# Altium PCB Cabinet_System_Bmduino.PcbDoc
Units mil, origin at the board's own origin, x right, y up, seen from the top; angles counter-clockwise.
Board outline 2057.9 x 2157.9 mil, 2 copper layers (Top Layer, Bottom Layer); 36 components, 34 nets, 170 pads, 44 vias.
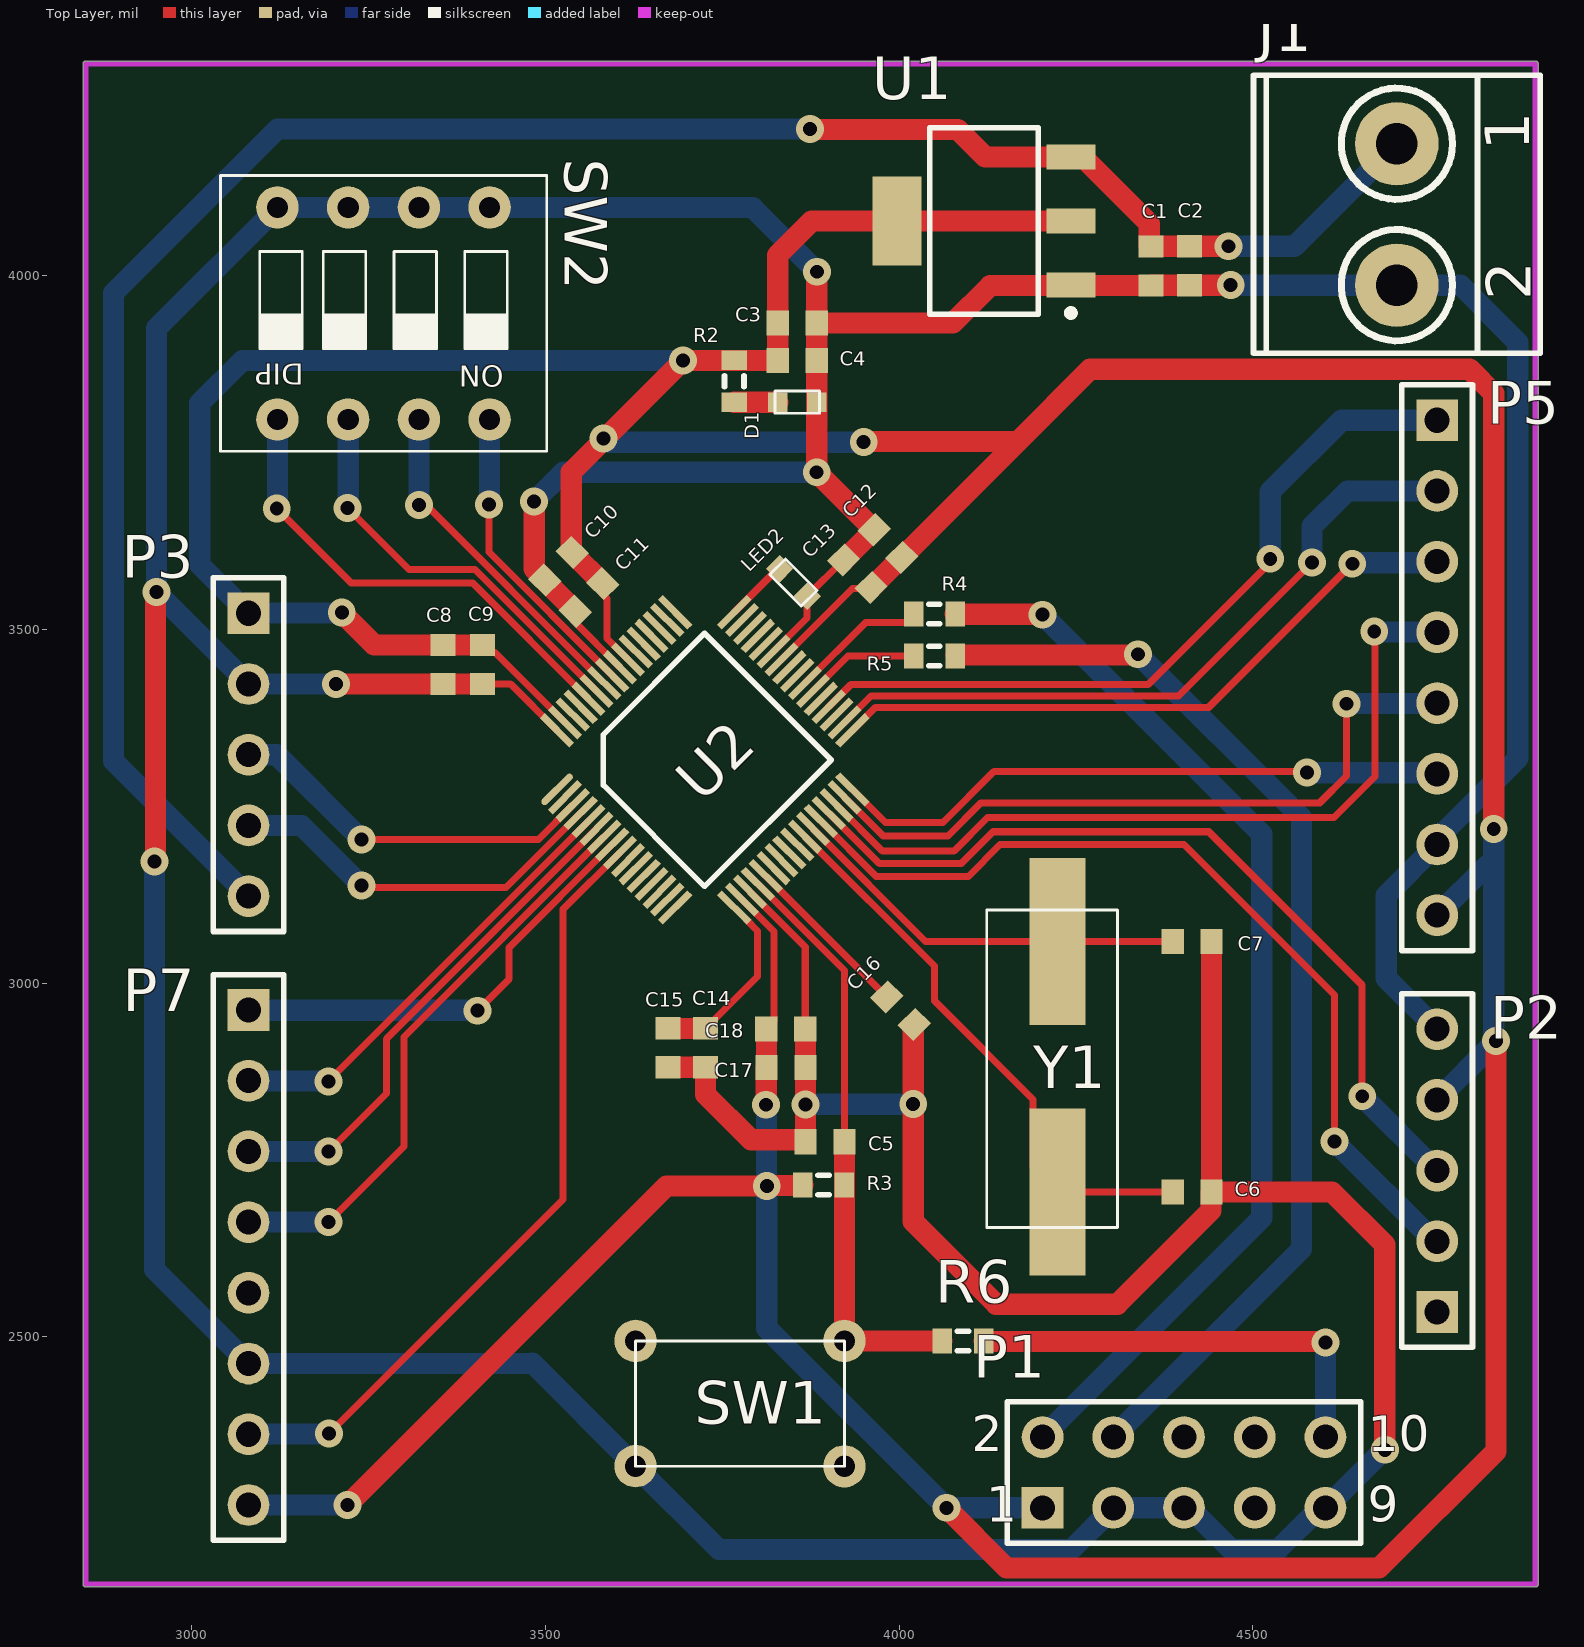
[diagram p0: Top Layer view]
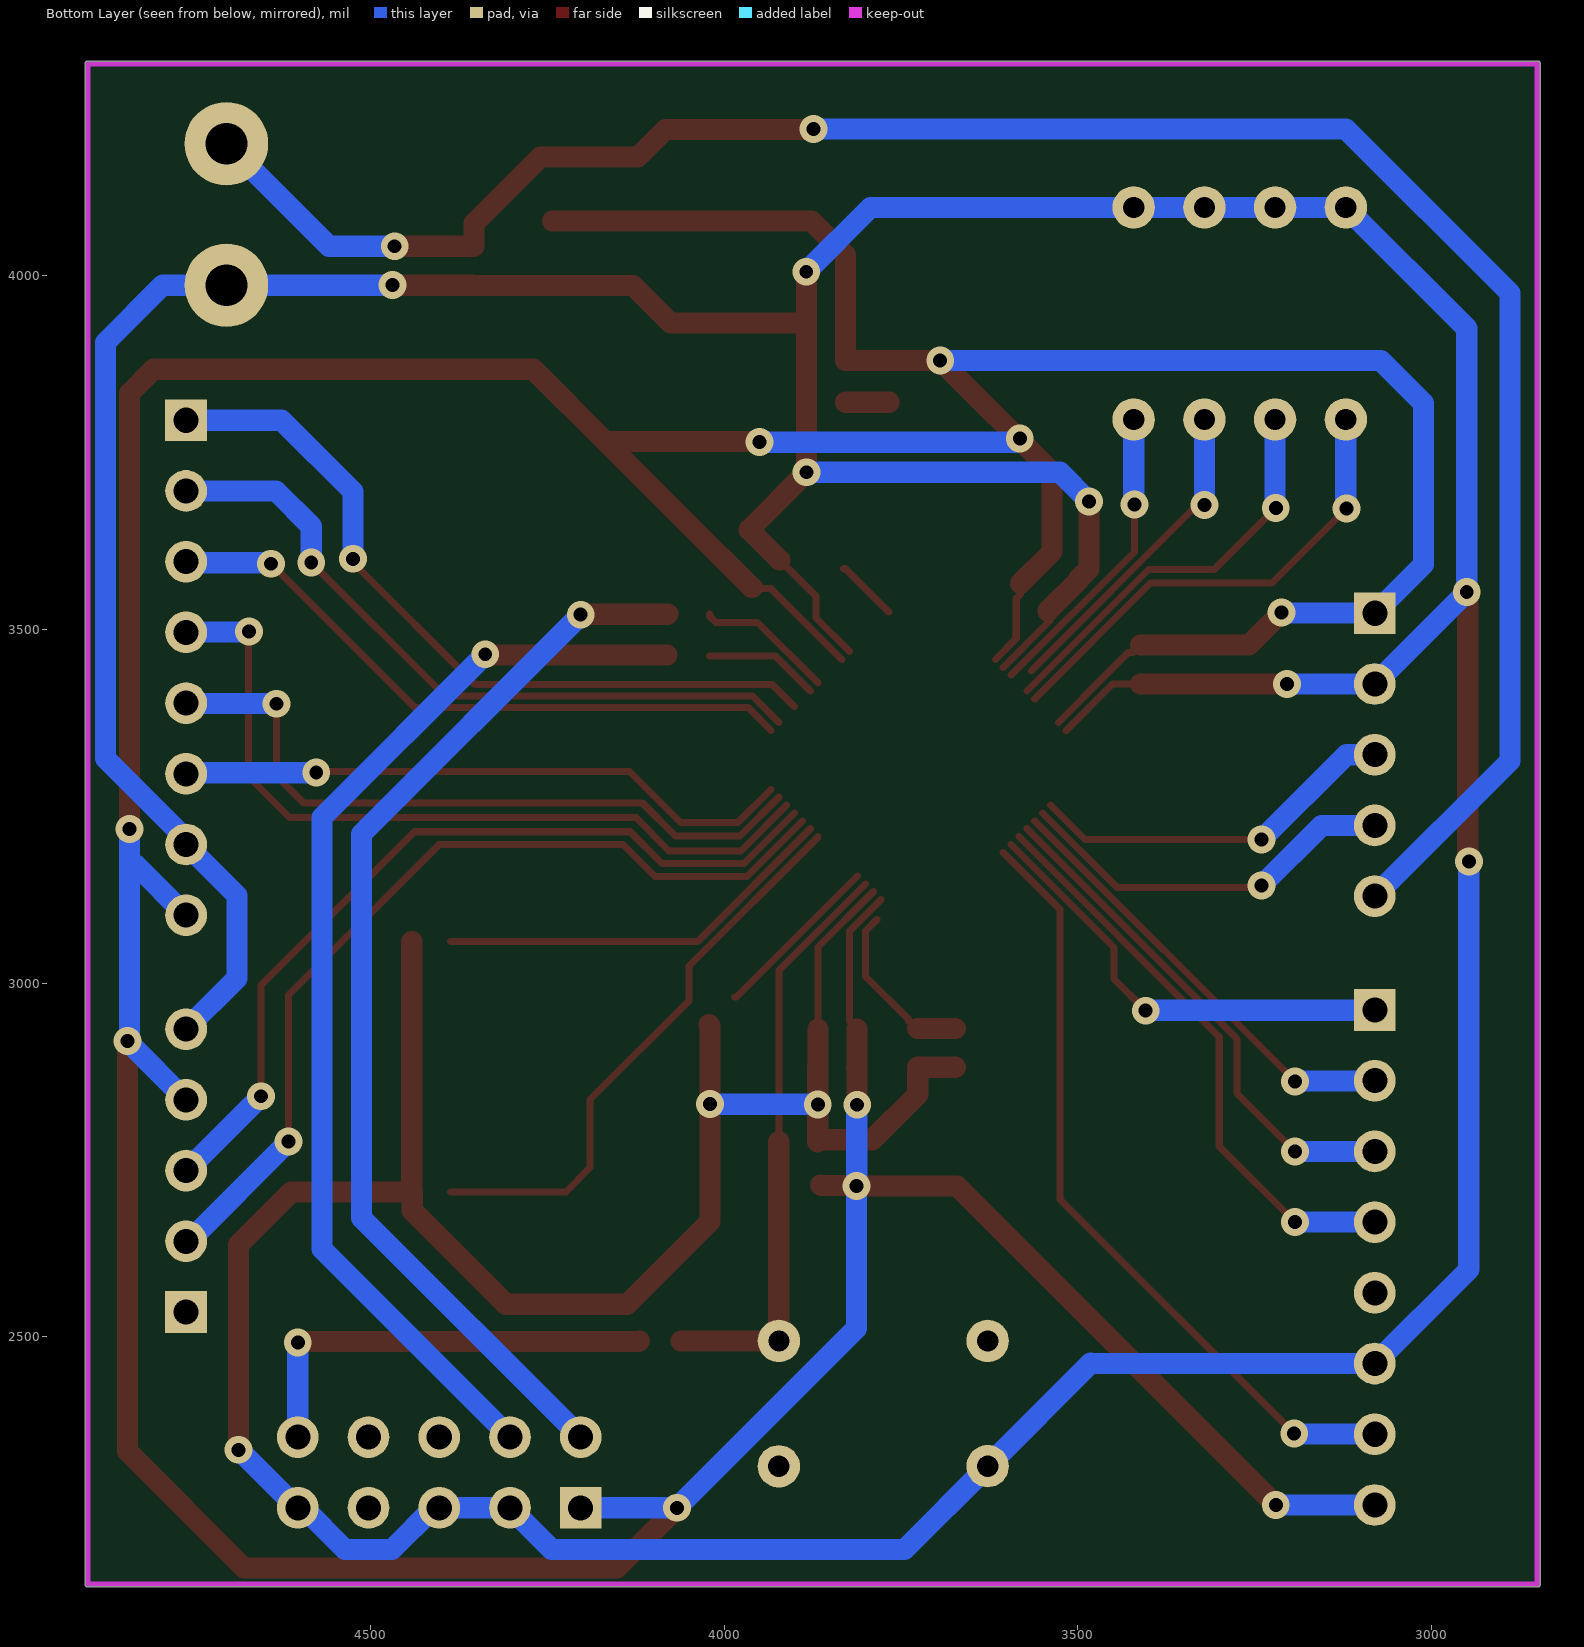
[diagram p1: Bottom Layer view, seen from below]

## Layer stack, top to bottom
Top Solder: solder mask 0.4, Solder Resist, Dk 3.5
Top Layer: signal copper 1.4
Dielectric 1: dielectric 12.6, FR-4, Dk 4.8
Bottom Layer: signal copper 1.4
Bottom Solder: solder mask 0.4, Solder Resist, Dk 3.5

## Board outline
2846.05,2150 ccw(c2850,2150) 2850,2146.05 4900,2146.05 ccw(c4900,2150) 4903.95,2150 4903.95,4300 ccw(c4900,4300) 4900,4303.95 2850,4303.95 ccw(c2850,4300) 2846.05,4300

## Design rules (kind name [scope] priority, off if disabled: settings)
Clearance [All] p1: gap=4 ignorepadtopadclearanceinfootprint=FALSE
PolygonConnect [All] p1: connectstyle=Relief reliefconductorwidth=10 reliefentries=4 polygonreliefangle="90 Angle" airgapwidth=10
RoutingVias [All] p1: holewidth=19.68 width=39.37 viastyle="Through Hole" minholewidth=19.68 minwidth=39.37 maxholewidth=19.68 maxwidth=39.37
SolderMaskExpansion [All] p1: expansion=4 istentingtop=FALSE
Width [All] p1: maxlimit=60 minlimit=7 preferedwidth=30 toplayer_maxwidth=30 minimp=50.000000 maximp=50.000000 favimp=50.000000
30 further rules are at their usual default settings.

## Components (designator, comment, footprint, x,y, rotation, side; value= is the part's Value field where it differs from the comment)
C1 "Cap Semi" 1608[0603] 4356.54,4014.12 r90 top value=0.1uF
C2 "Cap Semi" 1608[0603] 4411,4014.56 r90 top value=2.2uF
C3 "Cap Semi" 1608[0603] 3856,3933.6 r180 top value=0.1uF
C4 "Cap Semi" 1608[0603] 3856,3880.6 r180 top value=2.2uF
C5 "Cap Semi" 1608[0603] 3895.25,2775.67 r180 top value=0.01uF
C6 "Cap Semi" 1608[0603] 4414.44,2704.67 r0 top value=12pF
C7 "Cap Semi" 1608[0603] 4414.44,3059 r180 top value=12pF
C8 "Cap Semi" 1608[0603] 3355,3450.56 r270 top value=2.2uF
C9 "Cap Semi" 1608[0603] 3411,3450.56 r90 top value=0.1uF
C10 "Cap Semi" 1608[0603] 3518.49,3589.49 r225 top value=2.2uF
C11 "Cap Semi" 1608[0603] 3561.49,3545.49 r45 top value=0.1uF
C12 "Cap Semi" 1608[0603] 3984.51,3621.49 r135 top value=2.2uF
C13 "Cap Semi" 1608[0603] 3941,3579 r315 top value=0.1uF
C14 "Cap Semi" 1608[0603] 3726.44,2908.44 r270 top value=2.2uF
C15 "Cap Semi" 1608[0603] 3673.44,2908.44 r90 top value=0.1uF
C16 "Cap Semi" 1608[0603] 4002.03,2961 r135 top value=0.1uF
C17 "Cap Semi" 1608[0603] 3840.14,2880.88 r0 top value=2.2uF
C18 "Cap Semi" 1608[0603] 3839.85,2934.88 r180 top value=0.1uF
D1 "green_light" LED_Green 3828.44,3821.54 r0 top
J1 "Terminal_Block" "terminal block" 4704,3987 r0 top
LED2 "green_light" LED_Green 3831.03,3585.97 r315 top
P1 "SW-DP" HDR2X5 4203,2258 r0 top
P2 "Wi-Fi_USART1" HDR1X5 4761,2534.88 r90 top
P3 "Barcode & RS232" HDR1X5 3080,3523 r270 top
P5 "Epaper" HDR1X8 4761,3796 r270 top
P7 "RFID-RC522" HDR1X8 3080,2962 r270 top
R2 "Res3" J1-0603 3767,3851.07 r270 top value=100
R3 "Res3" J1-0603 3893.29,2714.67 r0 top value=100
R4 "Res3" J1-0603 4050,3522.14 r180 top value=100
R5 "Res3" J1-0603 4050,3462.68 r180 top value=100
R6 "Res3" J1-0603 4090.47,2494 r180 top value=100
SW1 "BUTTON_DIP_4PIN" Push_Button 3627.44,2316.83 r0 top
SW2 "DIP_4_Switch" Switch_4 3421,4097 r180 top
U1 "LM1117" "LM1117 - duplicate" 4120,4077.55 r180 top
U2 "HT32F52367" HT32H52367 3516.37,3273.95 r45 top
Y1 "SMD_8MHz" Quartz-Crystal-8MHz 4224,2714.51 r90 top

## Footprints (in the part's own frame and the unit in brackets; to place one, negate y for a bottom-side part, rotate by r counter-clockwise, add the part's x,y. Pads: shape width x height; smd on the part's side, far side on the other; paste and mask are expansions set on the pad)
1608[0603] [mm] "Chip Capacitor, Body 1.6x0.8mm, IPC High Density"
  rect 0.8x0.9 smd: 1(-0.7,0) 2(0.7,0)
  body extent -0.87,-0.48 0.87,0.48, height 1.3
HDR1X5 [mm] "Connector; Header; 5 Position"
  rect 1.5x1.5 hole 0.9: 1(0,0)
  round 1.5 hole 0.9: 2(2.54,0) 3(5.08,0) 4(7.62,0) 5(10.16,0)
  silkscreen extent -1.27,-1.27 11.43,1.27
HDR1X8 [mm] "Connector; Header; 8 Position"
  rect 1.5x1.5 hole 0.9: 1(0,0)
  round 1.5 hole 0.9: 2(2.54,0) 3(5.08,0) 4(7.62,0) 5(10.16,0) 6(12.7,0) 7(15.24,0) 8(17.78,0)
  silkscreen extent -1.27,-1.27 19.05,1.27
HDR2X5 [mm] "Connector; Header; 5x2 Position"
  rect 1.5x1.5 hole 0.9: 1(0,0)
  round 1.5 hole 0.9: 2(0,2.54) 3(2.54,0) 4(2.54,2.54) 5(5.08,0) 6(5.08,2.54) 7(7.62,0) 8(7.62,2.54) 9(10.16,0) 10(10.16,2.54)
  silkscreen extent -1.27,-1.27 11.43,3.81
HT32H52367 [mm] "HT32H52367"
  oval 1.5x0.25 smd: 1(0,0)
  rect 1.5x0.25 smd: 2(0,-0.4) 3(0,-0.8) 4(0,-1.2) 5(0,-1.6) 6(0,-2) 7(0,-2.4) 8(0,-2.8) 9(0,-3.2) 10(0,-3.6) 11(0,-4) 12(0,-4.4) 13(0,-4.8) 14(0,-5.2) 15(0,-5.6) 16(0,-6) 33(9,-6) 34(9,-5.6) 35(9,-5.2) 36(9,-4.8) 37(9,-4.4) 38(9,-4) 39(9,-3.6) 40(9,-3.2) 41(9,-2.8) 42(9,-2.4) 43(9,-2) 44(9,-1.6) 45(9,-1.2) 46(9,-0.8) 47(9,-0.4) 48(9,0)
  rect 0.25x1.5 smd: 17(1.5,-7.5) 18(1.9,-7.5) 19(2.3,-7.5) 20(2.7,-7.5) 21(3.1,-7.5) 22(3.5,-7.5) 23(3.9,-7.5) 24(4.3,-7.5) 25(4.7,-7.5) 26(5.1,-7.5) 27(5.5,-7.5) 28(5.9,-7.5) 29(6.3,-7.5) 30(6.7,-7.5) 31(7.1,-7.5) 32(7.5,-7.5) 49(7.5,1.5) 50(7.1,1.5) 51(6.7,1.5) 52(6.3,1.5) 53(5.9,1.5) 54(5.5,1.5) 55(5.1,1.5) 56(4.7,1.5) 57(4.3,1.5) 58(3.9,1.5) 59(3.5,1.5) 60(3.1,1.5) 61(2.7,1.5) 62(2.3,1.5) 63(1.9,1.5) 64(1.5,1.5)
  silkscreen extent 1.28,-6.21 7.71,0.22
J1-0603 [mm] "Chip Resistor, Body 1.6x0.8mm, IPC High Density"
  rect 0.7x0.9 smd: 1(-0.75,0) 2(0.75,0)
  silkscreen extent -0.2,-0.35 0.2,0.35, body extent -0.85,-0.48 0.85,0.48, height 0.9
LED_Green [mm] "LED_0603"
  rect 0.7x0.7 smd: 1(0,0) 2(1.4,0)
  silkscreen extent -0.1,-0.4 1.5,0.4
"LM1117 - duplicate" [mm] "SOT223, 4-Leads, Body 6.50x7.00mm (avg), Pitch 2.30mm, IPC Medium Density"
  rect 1.75x0.9 smd: 1(-3.125,2.3) 2(-3.125,0) 3(-3.125,-2.3)
  rect 1.75x3.2 smd: 4(3.125,0)
  silkscreen extent -3.25,-3.35 1.95,3.42, body extent -1.85,-3.35 1.85,3.35, height 1.8
Push_Button [mil] "6*6"
  round 60 hole 30: 1(0,177.17) 2(0,0) 3(295.28,177.17) 4(295.37,-0.17)
  silkscreen extent 0,0 295,177
Quartz-Crystal-8MHz [mm] "Quartz-Crystal-8MHz"
  rect 6x2 smd: 1(-0.25,0) 2(8.75,0)
  silkscreen extent -1.52,-2.16 9.88,2.54
Switch_4 [mil] "DIP_4_Switch"
  round 60 hole 30: 1(0,300) 2(100,300) 3(200,300) 4(300,300) 5(0,0) 6(100,0) 7(200,0) 8(300,0)
  silkscreen extent -81,-45 381,345
"terminal block" [mm]
  round 3 hole 1.5 paste+0 mask+0.051: 1(0,5.08) 2(0,0)
  silkscreen extent -5.15,-2.44 5.15,7.54

## Part data
C1 C2 C3 C4 C5 C6 C7 C8 C9 C10 C11 C12 C13 C14 C15 C16 C17 C18: "Capacitor (Semiconductor SIM Model)", LatestRevisionDate=29-May-2009, LatestRevisionNote="IPC-7351 Footprint Added.", PackageDescription="Chip Capacitor", PackageReference=C1206, Published=8-Jun-2000, Publisher="Altium Limited"
D1 LED2: library part LED_Green
J1: library part "Terminal Block"
P1: library part "Header 5X2", "Header, 5-Pin, Dual row", LatestRevisionDate=17-Jul-2002, LatestRevisionNote="Re-released for DXP Platform.", Publisher="Altium Limited"
P2 P3: library part "Header 5", "Header, 5-Pin", LatestRevisionDate=17-Jul-2002, LatestRevisionNote="Re-released for DXP Platform.", Publisher="Altium Limited"
P5 P7: library part "Header 8", "Header, 8-Pin", LatestRevisionDate=17-Jul-2002, LatestRevisionNote="Re-released for DXP Platform.", Publisher="Altium Limited"
R2 R3 R4 R5 R6: "Resistor", LatestRevisionDate=29-May-2009, LatestRevisionNote="IPC-7351 Footprint Added.", PackageDescription="Chip Resistor", PackageReference=J1-0603, Published=8-Jun-2000, Publisher="Altium Limited"
SW1: library part Push_Button
SW2: library part Switch_4
Y1: library part Quartz_Crystal_8MHz

## Via types
v1: diameter 39.37, hole 19.68, Top Layer to Bottom Layer, 44 vias

## Nets (pads, with @x,y where several pads share a name; then routed paths per layer and width w, separated by ;. In a path a pad name is that pad's centre, name@x,y a point inside that pad or via, vN(x,y) a via of type N, cw(c..) or ccw(c..) an arc to the next point about the centre after c; other vN are vias at no path point)
3.3V: C3.2 C4.2 C8.1 C9.2 C10.1 C11.2 C12.1 C13.2 C17.1 C18.2 P1.1 P2.4 P3.1 P5.8 P7.8 R2.1 R3.1 U1.2 U1.4 U2.18 U2.42 U2.55 U2.63 | length 9247.5
  Top Layer w10: C9.2 3421.75,3467.37 3428.73,3467.37 3459.1,3437 U2.63 ; C11.2 3580.97,3549.77 3587,3543.75 3587,3487.27 U2.55 ; U2.18 3823.15,3072.95 3823.03,3072.83 3823.03,2945.63 C18.2 ; U2.42 3934.16,3558.12 3959.1,3558.12 C13.2
  Top Layer w30: v1(3212,3524) 3257.88,3478.12 C8.1 C9.2 ; v1(3220,2262) 3671,2713 v1(3813,2713) 3813.83,2713.83 3862.92,2713.83 R3.1 ; C11.2 3580.97,3565.47 3537.97,3608.47 C10.1 3536.58,3610.37 3536.58,3722.58 v1(3694.6,3880.6) R2.1 C4.2 C3.2 3828.44,4029.44 3876.55,4077.55 U1.4 U1.2 ; v1(3812,2828) 3812.29,2828.29 3812.29,2880.59 C17.1 3812.43,2881.03 3812.43,2934.74 C18.2 ; v1(3950,3765) 3951,3766 4168,3766 ; C13.2 3961,3559.51 4003.49,3602 C12.1 ; C12.1@4005.39,3603.39 4168,3766 ; v1(4067,2258) 4152.06,2172.94 4678.94,2172.94 4844,2338 v1(4844,2918) ; v1(4841,3218) 4841,3834 4807,3868 4270,3868 4168,3766
  Bottom Layer w30: P3.1@3065.47,3537.53 3011,3592 3011,3820 3071.6,3880.6 v1(3694.6,3880.6) ; P7.8 v1(3220,2262) ; P3.1 3080.5,3523.5 3211.5,3523.5 v1(3212,3524) ; v1(3582,3770) 3584.54,3770 3589.54,3765 v1(3950,3765) ; v1(3812,2828) 3812.5,2827.5 3812.5,2713.5 v1(3813,2713) 3813,2512 v1(4067,2258) P1.1 ; P2.4 4841,2914.88 v1(4841,3218) ; P5.8@4761,3088.14 P5.8 4832,3167 4839,3167 4839.21,3167.21
5V: C1.2 C2.2 J1.1 P3.5 U1.3 | length 2990.7
  Top Layer w30: v1(3874,4208) 3875,4207 4083,4207 4121.9,4168.1 U1.3 4259.76,4168.1 4353.82,4074.05 4353.82,4042.43 4354.35,4041.9 4410.78,4041.9 C2.2 4411.06,4042.06 4465.94,4042.06 v1(4466,4042)
  Bottom Layer w30: P3.5 2889,3314 2889,3976 3121,4208 v1(3874,4208) ; v1(4466,4042) 4559,4042 J1.1
CLDO: C14.1 C15.2 U2.17 | length 227.5
  Top Layer w10: C14.1@3739.16,2946.75 3739.16,2948.72 3800,3009.56 3800,3073.83 U2.17@3784.26,3089.57
  Top Layer w30: C15.2 C14.1
GND: C1.1 C2.1 C3.1 C4.1 C5.2 C6.2 C7.1 C8.2 C9.1 C10.2 C11.1 C12.2 C13.1 C14.2 C15.1 C16.1 C17.2 C18.1 D1.2 J1.2 LED2.2 P1.3 P1.5 P1.9 P2.5 P3.2 P5.7 P7.6 SW1.2 SW2.5 SW2.6 SW2.7 SW2.8 U1.1 U2.19 U2.43 U2.56 U2.64 | length 11024.8
  Top Layer w10: C9.1 3450.83,3423 U2.64 ; C11.1@3539.39,3512.61 U2.56 ; U2.19 3867.4,3050.97 C18.1 ; U2.43 3822.59,3468.93 3870,3516.34 LED2.2 C13.1
  Top Layer w30: v1(2947,3172) 2948.5,3173.5 2948.5,3551.5 v1(2950,3553) ; v1(3204,3423) C8.2 C9.1 ; v1(3484,3681.1) 3484,3586.06 3499,3571.06 3499,3569.5 3542,3526.5 C11.1 ; C15.1 C14.2 3726.44,2842.56 3790.61,2778.39 3866.95,2778.39 C5.2@3867.7,2777.64 ; C18.1 3867.55,2934.74 3867.55,2881.03 C17.2 v1(3867.7,2828.28) C5.2@3867.7,2777.64 ; C5.2 C5.2@3867.7,2777.64 ; v1(3884,4006) 3883.78,4005.78 3883.78,3933.82 C3.1 ; C13.1 3922.03,3598.49 3964.51,3640.97 C12.2 v1(3883.56,3722.44) D1.2 C4.1 C3.1 ; C16.1 4020.12,2940.12 4020.12,2829.12 v1(4020,2829) 4020,2663 4137,2546 4309,2546 4441.25,2678.25 4441.25,2703.92 C6.2 ; 4076,3933.44 4129.12,3986.56 4243.03,3986.56 C1.1 ; 4076.16,3933.6 C3.1 ; C1.1@4356.98,3987 C2.1 v1(4469,3987) ; C7.1 C6.2 ; v1(4687,2340) 4687,2630 4612.33,2704.67 C6.2
  Bottom Layer w30: v1(2947,3172) 2947,2595 P7.6 3481,2462 3481.64,2462.64 SW1.2 3745.28,2199 4244,2199 P1.3 P1.5 4410.86,2258 4469.86,2199 4536.14,2199 4595.14,2258 4604,2258 4686,2340 v1(4687,2340) ; v1(3204,3423) P3.2 v1(2950,3553) 2950,3926 SW2.8 SW2.7 SW2.6 SW2.5 3793,4097 v1(3884,4006) ; v1(3484,3681.1) 3525.34,3722.44 v1@3881.02,3722.44 ; v1(3867.7,2828.28) 3868.06,2828.64 4019.64,2828.64 v1(4020,2829) ; v1(4469,3987) J1.2 4794,3987 4875,3906 4875,3317.86 4761,3203.86 P5.7 4689,3124 4689,3006.88 P2.5
GPIO_Busy_PA10: P5.1 U2.36 | length 1086.8
  Top Layer w10: U2.36 3900.65,3390.87 3931.78,3422 4352,3422 4525,3595 v1(4525,3600)
  Bottom Layer w30: v1(4525,3600) 4525,3695 4626,3796 P5.1
GPIO_DC_PC13: P5.3 U2.33 | length 925.9
  Top Layer w10: U2.33 3966.48,3390 4438,3390 v1(4641,3593)
  Bottom Layer w30: v1(4641,3593) 4642.5,3594.5 4759.5,3594.5 P5.3
GPIO_DIP1_PC1: SW2.1 U2.57 | length 434.2
  Top Layer w10: v1(3420,3677) 3420,3609.73 U2.57
  Bottom Layer w30: v1(3420,3677) 3421,3678 SW2.1
GPIO_DIP2_PC2: SW2.2 U2.58 | length 462.9
  Top Layer w10: v1(3321,3676) 3326.62,3670.38 3336.97,3670.38 U2.58@3565.78,3441.57
  Bottom Layer w30: v1(3321,3676) SW2.2
GPIO_DIP3_PC3: SW2.3 U2.59 | length 583.3
  Top Layer w10: v1(3220,3672) 3307,3585 3400.19,3585 U2.59
  Bottom Layer w30: v1@3221,3673 SW2.3
GPIO_DIP4_PB6: SW2.4 U2.60 | length 677.3
  Top Layer w10: v1(3120,3671) 3225.32,3565.68 3397.24,3565.68 U2.60
  Bottom Layer w30: v1@3121,3672 SW2.4
GPIO_LED1_PD3: LED2.1 U2.48 | length 89.6
  Top Layer w10: U2.48 3767.03,3524.5 3828.5,3585.97 LED2.1
GPIO_RST_PA8: P5.2 U2.34 | length 1003.7
  Top Layer w10: U2.34 3960.21,3406 4395,3406 v1(4584,3595)
  Bottom Layer w30: v1(4584,3595) 4584,3646 4634,3696 P5.2
GPIO_RST_PD4: P7.7 U2.9 | length 1106
  Top Layer w10: v1(3194,2363) 3525,2694 3525,3104.41 U2.9
  Bottom Layer w30: P7.7@3080.5,2362.5 3193.5,2362.5 v1(3194,2363)
NetD1_1: D1.1 R2.2 | length 61.4
  Top Layer w30: R2.2 D1.1
NetP1_2: P1.2 R4.1 | length 1543.8
  Top Layer w30: R4.1 4080.1,3521.57 4202.43,3521.57 v1(4203,3521)
  Bottom Layer w30: P1.2 4513,2668 4513,3211 v1(4203,3521)
NetP1_4: P1.4 R5.1 | length 1570.6
  Top Layer w30: R5.1@4080.75,3463.84 4336.84,3463.84 v1(4338,3465)
  Bottom Layer w30: P1.4 4569,2624 4569,3234 v1(4338,3465)
NetP1_10: P1.10 R6.1 | length 617.8
  Top Layer w30: R6.1 4121,2493 4602,2493 v1(4603,2492)
  Bottom Layer w30: P1.10 v1(4603,2492)
nRST: C5.1 R3.2 R6.2 SW1.3 U2.20 | length 835.3
  Top Layer w10: U2.20 3922.81,3017.83 C5.1
  Top Layer w30: C5.1 R3.2 3922.77,2714.62 3922.77,2494.05 SW1.3 R6.2
SPI0_MISO_PA6: P7.4 U2.7 | length 819.8
  Top Layer w10: v1(3193,2662) 3300,2769 3300,2923.96 U2.7
  Bottom Layer w30: P7.4 v1(3193,2662)
SPI0_MOSI_PA5: P7.3 U2.6 | length 726.3
  Top Layer w10: v1(3193,2762) 3275,2844 3275,2921.23 U2.6
  Bottom Layer w30: P7.3 v1(3193,2762)
SPI0_SCK_PA4: P7.2 U2.5 | length 633.1
  Top Layer w10: v1@3193,2861.39 3560.91,3229.3 U2.5
  Bottom Layer w30: P7.2@3080.5,2861.5 3192.5,2861.5 v1(3193,2861)
SPI0_SEL_PA7: P7.1 U2.8 | length 637.5
  Top Layer w10: v1(3404,2961) 3448.68,3005.68 3448.68,3050.37 U2.8
  Bottom Layer w30: P7.1@3080.5,2961.5 3403.5,2961.5 v1(3404,2961)
SPI1_MOSI_PC12: P5.6 U2.32 | length 877.6
  Top Layer w10: U2.32 3980.9,3227 4062,3227 4134,3299 4576,3299 v1(4577,3298)
  Bottom Layer w30: v1(4577,3298) 4577.5,3297.5 4759.5,3297.5 P5.6
SPI1_SCK_PC11: P5.5 U2.31 | length 998.5
  Top Layer w10: U2.31 3977.63,3208 4069,3208 4116,3255 4595,3255 4633,3293 v1(4633,3395)
  Bottom Layer w30: v1(4633,3395) 4633.5,3395.5 4760.5,3395.5 P5.5
SPI1_SEL_PC10: P5.4 U2.30 | length 1126.4
  Top Layer w10: U2.30 3976.36,3187 4078,3187 4125,3234 4615,3234 4673,3292 4673,3496 v1(4672,3497)
  Bottom Layer w30: v1(4672,3497) 4672.5,3496.5 4760.5,3496.5 P5.4
SWCLK_PA12: R5.2 U2.38 | length 162.7
  Top Layer w10: U2.38 3927.81,3462.68 R5.2
SWDIO_PA13: R4.2 U2.39 | length 195.8
  Top Layer w10: U2.39 3952.86,3510 4011.69,3510 4020.47,3518.78 R4.2
USART0_Rx_PA3: P3.4 U2.4 | length 549.9
  Top Layer w10: v1(3240,3138) 3243,3135 3444.23,3135 U2.4
  Bottom Layer w30: P3.4 3155,3223 v1(3240,3138)
USART0_Tx_PA2: P3.3 U2.3 | length 528.5
  Top Layer w10: v1(3240,3203) 3489.96,3203 U2.3
  Bottom Layer w30: P3.3 3120,3323 v1(3240,3203)
USART1_Rx_PC0: P2.3 U2.29 | length 1198.3
  Top Layer w10: U2.29 3972.08,3169 4088,3169 4133,3214 4438,3214 4655,2997 v1(4655,2840)
  Bottom Layer w30: v1(4655,2840) P2.3@4760.12,2734.88
USART1_Tx_PB15: P2.2 U2.28 | length 1276.4
  Top Layer w10: U2.28 3967.81,3151 4098,3151 4143,3196 4403,3196 4616,2983 v1(4616,2776)
  Bottom Layer w10: P2.2@4757.12,2634.88 P2.2
  Bottom Layer w30: v1(4616,2776) P2.2@4757.12,2634.88
VBAT: C16.2 U2.21 | length 244.9
  Top Layer w10: U2.21 3811.57,3151.46 C16.2 C16.2@3985.51,2980.49
XTALIN_PB13: C6.1 U2.26 Y1.1 | length 813.2
  Top Layer w10: U2.26 3867.14,3207.02 4050,3024.16 4050,2975 4189.63,2835.37 4189.63,2739.04 Y1.1 C6.1
XTALOUT_PB14: C7.2 U2.27 Y1.2 | length 574.6
  Top Layer w10: U2.27 4037.54,3059 Y1.2 C7.2
pads on no net: P1.6 P1.7 P1.8 P2.1 P7.5 SW1.1 SW1.4 U2.1 U2.2 U2.10 U2.11 U2.12 U2.13 U2.14 U2.15 U2.16 U2.22 U2.23 U2.24 U2.25 U2.35 U2.37 U2.40 U2.41 U2.44 U2.45 U2.46 U2.47 U2.49 U2.50 U2.51 U2.52 U2.53 U2.54 U2.61 U2.62

## Keep-outs
Keep-Out Layer:
  lines w7.87: 2850,2150 2850,4300 4900,4300 4900,2150 2850,2150

## Silkscreen, mask and mechanical layers (free items; w line width, h text height)
Mechanical 1:
  lines w10: 2680,2210.92 2700,2150.92 ; 2680,4240.92 2700,4300.92 ; 2690,2150.92 2710,2150.92 ; 2690,4300.92 2710,4300.92 ; 2700,2950 2700,2150.92 ; 2700,3501.83 2700,4300.92 ; 2720,2210.92 2700,2150.92 ; 2720,4240.92 2700,4300.92 ; 2850,4390 2850,4410 ; 2910,4380 2850,4400 ; 2910,4420 2850,4400 ; 3594.09,4400 2850,4400 ; 4155.91,4400 4900,4400 ; 4840,4380 4900,4400 ; 4840,4420 4900,4400 ; 4900,4390 4900,4410
  text "2050 (mil)" at 3604.09,4364.01 h60
  text "2150 (mil)" at 2735.99,2960 h60 r90

## Text inside footprints (layer, text, board x,y; h text height)
J1: Top Overlay "2" at 4893,3966 h62.99 r90; Top Overlay "1" at 4891,4177 h62.99 r90
P1: Top Overlay "10" at 4663,2338 h50; Top Overlay "9" at 4663,2238 h50; Top Overlay "1" at 4123,2238 h50; Top Overlay "2" at 4103,2338 h50
SW2: Top Overlay "ON" at 3441,3873 h30 r180; Top Overlay "DIP" at 3158,3876 h30 r180